# Altium PCB HU_revC_TEMP.PcbDoc (part 5 of 5)
Units mm, origin at the board's own origin, x right, y up, seen from the top; angles counter-clockwise.
Board outline 164 x 88 mm, 6 copper layers (Top Layer, Layer 1, Layer 2, Layer 3, Layer 4, Bottom Layer), stack 1.538 mm thick; 730 components, 570 nets, 2585 pads, 244 vias.
Unrouted connection lines stored in the file: 1558.
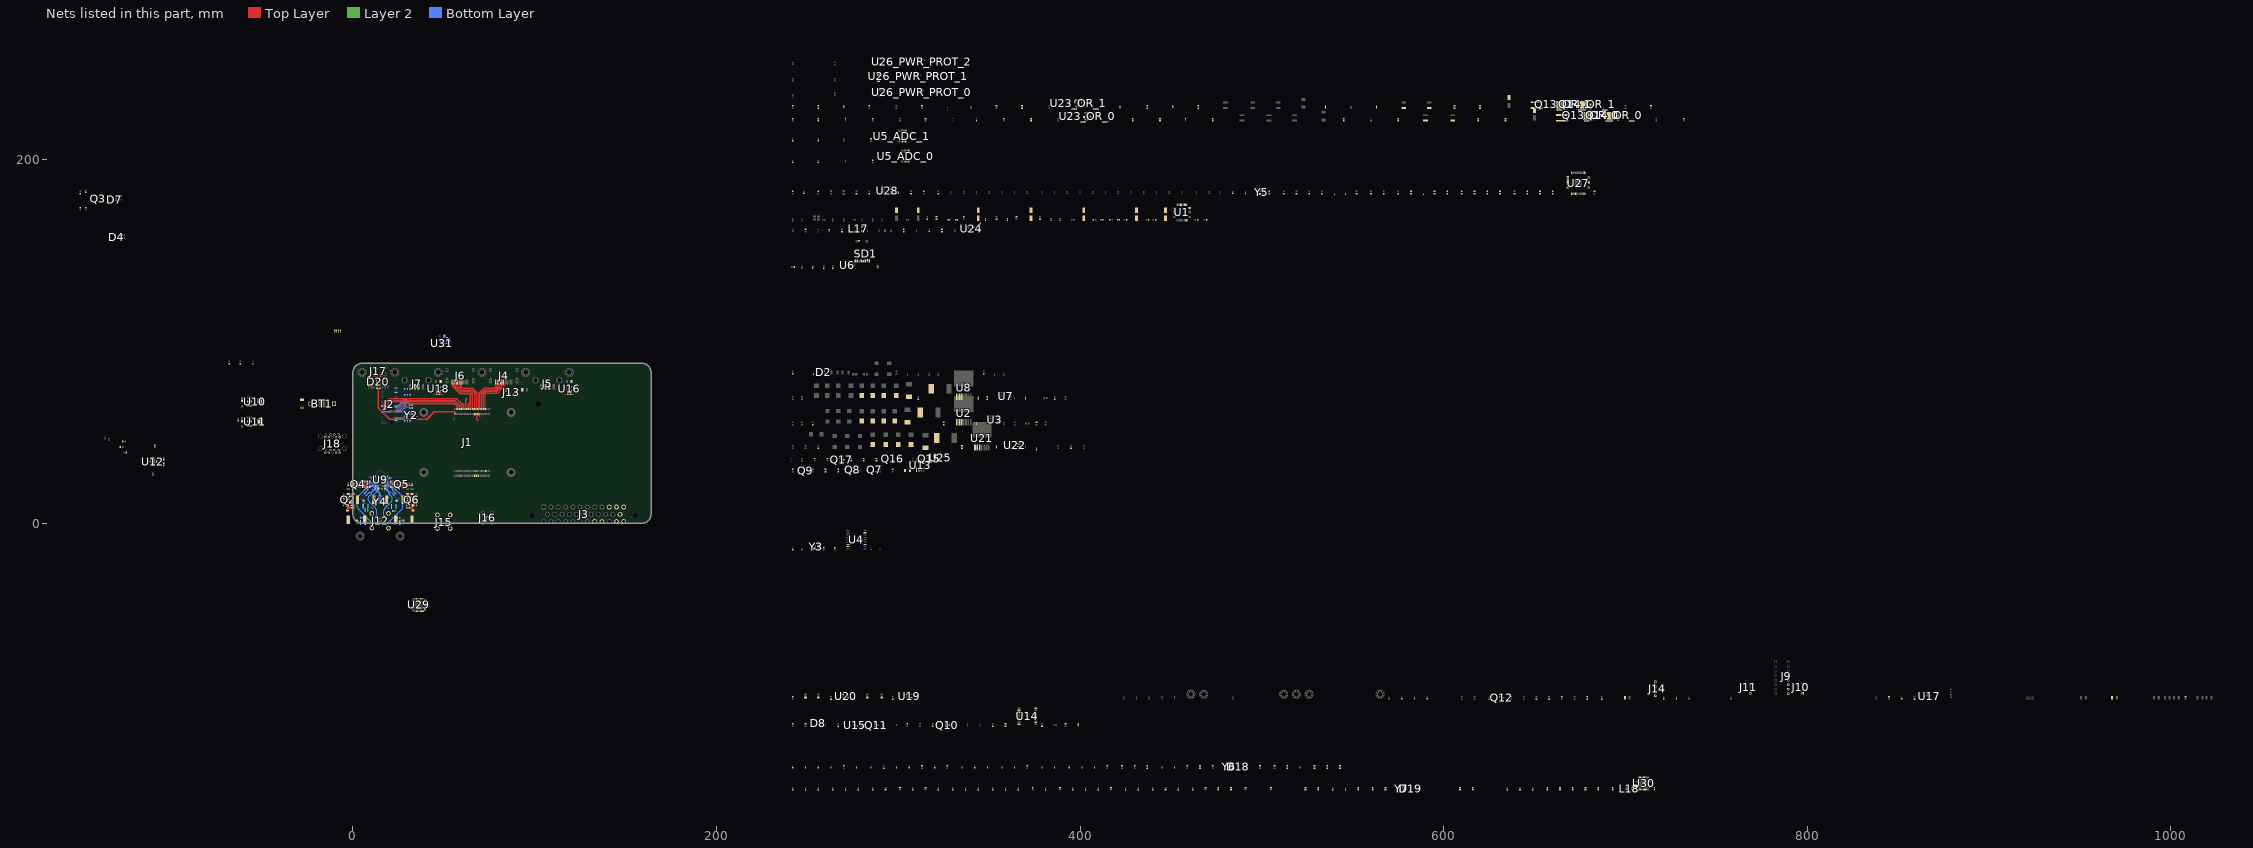
[diagram p5: the nets of this part, all layers, seen from the top]

## Via types
v1: diameter 0.5, hole 0.3, Top Layer to Bottom Layer, 244 vias

## Nets (pads, with @x,y where several pads share a name; then routed paths per layer and width w, separated by ;. In a path a pad name is that pad's centre, name@x,y a point inside that pad or via, vN(x,y) a via of type N, cw(c..) or ccw(c..) an arc to the next point about the centre after c; other vN are vias at no path point) (continued)
HDMI0_CK_P: J1.188 J4.10 | length 22.8
  Top Layer w0.123: J1.188@72.9,62.82 72.938,62.858 72.938,70.896 73.616,71.573 79.616,71.573 83.338,75.296 83.338,76.19 83.2,76.328 83.2,76.339 83,76.539 J4.10@83,77.69
HDMI0_D0_N: J1.184 J4.9 | length 22.7
  Top Layer w0.123: J1.184@72.1,62.82 72.062,62.858 72.062,63.401 72.062,71.062 73.25,72.25 79.25,72.25 82.162,75.162 82.162,76.19 82.3,76.328 82.3,76.339 82.5,76.539 J4.9@82.5,77.69
HDMI0_D0_P: J1.182 J4.7 | length 22.7
  Top Layer w0.123: J1.182@71.7,62.82 71.738,62.858 71.738,71.196 73.116,72.573 79.116,72.573 81.838,75.296 81.838,76.19 81.7,76.328 81.7,76.339 81.5,76.539 J4.7@81.5,77.69
HDMI0_D1_N: J1.178 J4.6 | length 22.6
  Top Layer w0.123: J1.178@70.9,62.82 70.862,62.858 70.862,63.401 70.862,71.362 72.75,73.25 78.75,73.25 80.662,75.162 80.662,76.19 80.8,76.328 80.8,76.339 81,76.539 J4.6@81,77.69
HDMI0_D1_P: J1.176 J4.4 | length 22.6
  Top Layer w0.123: J1.176@70.5,62.82 70.538,62.858 70.538,71.496 72.616,73.573 78.616,73.573 80.338,75.296 80.338,76.19 80.2,76.328 80.2,76.339 80,76.539 J4.4@80,77.69
HDMI0_D2_N: J1.172 J4.3 | length 22.5
  Top Layer w0.123: J1.172@69.7,62.82 69.662,62.858 69.662,63.401 69.662,71.662 72.25,74.25 78.25,74.25 79.162,75.162 79.162,76.19 79.3,76.328 79.3,76.339 79.5,76.539 J4.3@79.5,77.69
HDMI0_D2_P: J1.170 J4.1 | length 22.5
  Top Layer w0.123: J1.170@69.3,62.82 69.338,62.858 69.338,71.796 72.116,74.573 78.116,74.573 78.838,75.296 78.838,76.19 78.7,76.328 78.7,76.339 78.5,76.539 J4.1@78.5,77.69
HDMI1_CK_N: J1.166 J6.12 | length 21.7
  Top Layer w0.123: J6.12@60,77.69 60,76.539 59.8,76.339 59.8,76.328 59.662,76.19 59.662,75.338 60.427,74.573 65.634,74.573 68.462,71.746 68.462,63.401 68.462,62.858 J1.166@68.5,62.82
HDMI1_CK_P: J1.164 J6.10 | length 21.7
  Top Layer w0.123: J6.10@59,77.69 59,76.539 59.2,76.339 59.2,76.328 59.338,76.19 59.338,75.204 60.293,74.25 65.5,74.25 68.138,71.612 68.138,62.858 J1.164@68.1,62.82
HDMI1_D0_N: J1.160 J6.9 | length 21.8
  Top Layer w0.123: J6.9@58.5,77.69 58.5,76.539 58.3,76.339 58.3,76.328 58.162,76.19 58.162,75.338 59.927,73.573 65.134,73.573 67.262,71.446 67.262,63.401 67.262,62.858 J1.160@67.3,62.82
HDMI1_D0_P: J1.158 J6.7 | length 21.8
  Top Layer w0.123: J6.7@57.5,77.69 57.5,76.539 57.7,76.339 57.7,76.328 57.838,76.19 57.838,75.204 59.793,73.25 65,73.25 66.938,71.312 66.938,62.858 J1.158@66.9,62.82
HDMI1_D1_N: J1.154 J6.6 | length 22
  Top Layer w0.123: J6.6@57,77.69 57,76.539 56.8,76.339 56.8,76.328 56.662,76.19 56.662,75.338 59.427,72.573 64.634,72.573 66.062,71.146 66.062,63.401 66.062,62.858 J1.154@66.1,62.82
HDMI1_D1_P: J1.152 J6.4 | length 22
  Top Layer w0.123: J6.4@56,77.69 56,76.539 56.2,76.339 56.2,76.328 56.338,76.19 56.338,75.204 59.293,72.25 64.5,72.25 65.738,71.012 65.738,62.858 J1.152@65.7,62.82
HDMI1_D2_N: J1.148 J6.3 | length 22.1
  Top Layer w0.123: J6.3@55.5,77.69 55.5,76.539 55.3,76.339 55.3,76.328 55.162,76.19 55.162,75.338 58.927,71.573 64.134,71.573 64.862,70.846 64.862,65.102 64.862,62.858 J1.148@64.9,62.82
HDMI1_D2_P: J1.146 J6.1 | length 22.1
  Top Layer w0.123: J6.1@54.5,77.69 54.5,76.539 54.7,76.339 54.7,76.328 54.838,76.19 54.838,75.204 58.793,71.25 64,71.25 64.538,70.712 64.538,64.968 64.538,63.401 64.538,62.858 J1.146@64.5,62.82
HV_CPU_FAN_PWM: J1.19 R152.2 R154.2
HV_PWR_EN: R209.1 U23_OR_0.7 U23_OR_1.7 U24.7
INT_VCC: F6.1 F18_PWR_PROT_0.1 F18_PWR_PROT_1.1 F18_PWR_PROT_2.1 R211.2 U25.3 U25.4
LAN8830_ALLPHYAD: R243.2 U29.13
LAN8830_CLK125_EN: R254.2 U29.34 U30.24
LAN8830_MODE0: R246.2 U29.33 U30.25
LAN8830_MODE1: R247.2 U29.32 U30.26
LAN8830_MODE2: R248.2 U29.30 U30.27
LAN8830_MODE3: R249.2 U29.29 U30.28
LAN8830_MODE4: R245.2 U29.36 U30.23
LAN8830_PHYAD0: R251.2 R252.2 U29.18
LAN8830_PHYAD1: R244.2 R250.2 U29.16
LAN8830_PHYAD2: R253.2 U29.15
LAN8830_RESET_N: C197.1 R242.2 U29.43
LAN8830_X25_N: C199.1 U29.45 Y6.3
LAN8830_X25_P: C198.1 U29.46 Y6.1
LAN8870_LINK_LED: R273.2 U30.38
LAN8870_MODE_STRP: R276.1 U30.18
LAN8870_RESET_N: C222.1 R263.2 R275.2 U30.39
LAN8870_RXCTL: R268.2 U29.26 U30.17
LAN8870_RXD0: R274.1 U29.19 U30.11
LAN8870_RXD1: R272.1 R278.2 U29.20 U30.12
LAN8870_RXD2: R271.1 U29.21 U30.14
LAN8870_RXD3: R277.2 U29.22 U30.15
LAN8870_SPEED_SEL: R267.1 U30.32
LAN8870_VBAT: C242.1 C243.1 R280.1 R287.2 U30.1
LAN8870_VDDA: C237.1 C238.1 C239.1 C240.1 C241.1 R281.1 R286.2 U30.37 U30.41 U30.45 U30.48
LAN8870_VDDIO: C244.1 C245.1 C246.1 C247.1 R263.1 R267.2 R268.1 R271.2 R272.2 R274.2 R276.2 R288.2 U30.13 U30.20 U30.36
LAN8870_X25_N: C224.1 U30.7 Y7.3
LAN8870_X25_P: C223.1 U30.6 Y7.1
LL_FR_L: C1.1 J10.1 R4.2
LL_FR_R: C2.1 J10.3 R7.2
LL_RR_L: C3.1 J11.1 R11.2
LL_RR_R: C4.1 J11.3 R14.2
LM74910H_ISCP_OR_0: C157_OR_0.1 R190_OR_0.1 U23_OR_0.18
LM74910H_ISCP_OR_1: C157_OR_1.1 R190_OR_1.1 U23_OR_1.18
LM74910H_VS_OR_0: C151_OR_0.1 C152_OR_0.1 Q13_OR_0.5-6-7-8 R187_OR_0.2 R189_OR_0.1 R190_OR_0.2 R191_OR_0.2 R193_OR_0.2 U23_OR_0.22 U23_OR_0.24
LM74910H_VS_OR_1: C151_OR_1.1 C152_OR_1.1 Q13_OR_1.5-6-7-8 R187_OR_1.2 R189_OR_1.1 R190_OR_1.2 R191_OR_1.2 R193_OR_1.2 U23_OR_1.22 U23_OR_1.24
LNA_EN: R132.1 U14.13
M2_3V3: C36.1 C37.1 C38.1 C39.1 C40.1 C41.1 C42.1 C43.1 C44.1 C45.1 D4.2 D4.3 J2.2 J2.4 J2.12 J2.14 J2.16 J2.18 J2.70 J2.72 J2.74 R45.1 R46.1 U31.1 Y2.1 Y2.4
MATENET_GND: C124.1 C125.1 C126.1 C127.1 C221.1 J15.3 R264.2
MAX96724_1V2: C86.1 C98.2 C99.2 C101.2 C102.2 C109.2 C110.2 C111.1 R106.2 U9.30 U9.55 U9.56 U11.2 U11.4 | length 4.3
  Bottom Layer w0.3: v1(9.25,25.5) 9.288,25.462 9.649,25.462 U9.30@10.315,24.795 ; U9.55@19.685,24.795 20.601,25.712 20.712,25.712 v1(20.75,25.75) ; U9.56@20.038,24.442 20.596,25 v1(21.25,25)
MAX96724_1V8: C84.1 C103.2 C104.2 C105.2 C106.2 C112.1 U9.7 U9.21 U10.2 U10.4 | length 4.4
  Bottom Layer w0.3: v1(10.75,19.75) 10.776,19.75 11.026,20 11.354,20 U9.21@12.437,21.083 ; U9.7@17.917,21.437 19.315,20.038 19.462,20.038 v1(19.5,20)
MAX96724_3V3: C83.2 C85.2 C107.2 C108.2 C113.1 F12.1 R71.2 R83.2 R99.2 U9.24 U10.3 U11.3 | length 1.1
  Bottom Layer w0.3: v1(10.5,21.5) 10.538,21.538 10.77,21.538 U9.24@11.376,22.144
MAX96724_CFG0: R71.1 R74.2 U9.4 | length 7.2
  Bottom Layer w0.2: U9.4@18.977,22.497 19.225,22.25 21.75,22.25 R74.2@23.79,20.21 R71.1@24.79,21.21
MAX96724_CFG1: R83.1 R88.2 U9.25 | length 7.2
  Bottom Layer w0.2: R83.1@5.21,21.21 R88.2@6.21,20.21 8.25,22.25 10.775,22.25 U9.25@11.023,22.497
MAX96724_PoC_A: C65.2 J12.2 L5.2 | length 25.3
  Bottom Layer w0.156: C65.2@6.412,18.412 3.244,15.244 ccw(c5.04,13.448) 2.5,13.448 2.5,9.45 ccw(c5.04,9.45) 3.244,7.654 L5.2@9.949,0.949 10.244,0.654 ccw(c12.04,2.45) 12.04,-0.09 J12.2@13,-0.09
MAX96724_PoC_A_V_N: L3.1 R70.1 R108.1 | length 3.4
  Top Layer w0.2: R70.1@-3,7.05 -3,8.25 -2.883,8.367 -2.049,8.367 -1.916,8.5 R108.1@-0.9,8.5
MAX96724_PoC_A_V_P: C68.2 Q2.4 R70.2 R107.1 | length 3.7
  Top Layer w0.2: R70.2@-3,9.95 -3,9 -2.75,8.75 -2.075,8.75 -0.9,9.925 R107.1@-0.9,10
MAX96724_PoC_B: C69.2 J12.1 L8.2 | length 13.6
  Bottom Layer w0.156: 8.284,13.48 ccw(c10.372,13.479) 8.897,12.001 ; 8.284,13.481 cw(c10.228,13.479) 8.854,14.854 C69.2@9.412,15.412 ; J12.1@13,3.91 13,6.846 ccw(c10.46,6.846) 12.256,8.642 L8.2@11.449,9.449 8.898,12 ; 8.897,12.001 8.898,12
MAX96724_PoC_B_V_N: L6.1 R82.1 R110.1 | length 4
  Top Layer w0.2: R82.1@6,20.05 6,21.283 6.117,21.4 7,21.4 7.55,20.85 7.55,20.3 R110.1@7.85,20
MAX96724_PoC_B_V_P: C72.2 Q4.4 R82.2 R109.1 | length 4.9
  Top Layer w0.2: R82.2@6,22.95 6,21.817 6.117,21.7 7.821,21.7 C72.2@8.021,21.5
  Top Layer w0.3: R109.1@7.85,23 7.936,22.914 7.936,21.7 7.936,21.586 C72.2@8.021,21.5
MAX96724_PoC_C: C73.2 J12.4 L11.2 | length 13.6
  Bottom Layer w0.156: J12.4@17,3.91 17,6.846 cw(c19.54,6.846) 17.744,8.642 L11.2@18.551,9.449 21.102,12 ; C73.2@20.588,15.412 21.146,14.854 cw(c19.772,13.479) 21.716,13.481 ; 21.716,13.48 cw(c19.628,13.479) 21.103,12.001 ; 21.102,12 21.103,12.001
MAX96724_PoC_C_V_N: L9.1 R93.1 R112.1 | length 3.7
  Top Layer w0.2: R112.1@22.15,20 22.15,20.075 22.733,20.658 22.733,20.983 23,21.25 23.75,21.25 24,21 R93.1@24,20.05
MAX96724_PoC_C_V_P: C78.2 Q5.4 R93.2 R111.1 | length 4.6
  Top Layer w0.2: C78.2@21.979,21.5 22,21.5 22.236,21.736 22.236,21.758 22.35,21.871 22.35,22.15 ; R111.1@22.15,23 22.35,22.8 22.35,22.15 ; R93.2@24,22.95 24,22 23.75,21.75 22.75,21.75 22.35,22.15
MAX96724_PoC_D: C79.2 J12.3 L14.2 | length 25.3
  Bottom Layer w0.156: J12.3@17,-0.09 17.96,-0.09 ccw(c17.96,2.45) 19.756,0.654 L14.2@20.051,0.949 26.756,7.654 ccw(c24.96,9.45) 27.5,9.45 27.5,13.448 ccw(c24.96,13.448) 26.756,15.244 C79.2@23.588,18.412
MAX96724_PoC_D_V_N: L12.1 R100.1 R116.1 | length 3.3
  Top Layer w0.2: R116.1@30.9,8.5 31.15,8.25 32.75,8.25 33,8 R100.1@33,7.05
MAX96724_PoC_D_V_P: C82.2 Q6.4 R100.2 R114.1 | length 3.7
  Top Layer w0.2: R114.1@30.9,10 30.9,9.925 32.075,8.75 32.75,8.75 33,9 R100.2@33,9.95
MAX96724_SIOA_N: C67.1 U9.22 | length 5.9
  Bottom Layer w0.123: C67.1@8.088,18.088 8.088,18.477 7.948,18.617 7.948,18.719 9.729,20.5 11.022,20.5 11.687,21.165 11.811,21.165 U9.22@12.083,21.437
MAX96724_SIOA_P: C65.1 U9.23 | length 5.9
  Bottom Layer w0.123: C65.1@7.088,19.088 7.477,19.088 7.617,18.948 7.719,18.948 9.595,20.823 10.888,20.823 11.458,21.394 11.458,21.519 U9.23@11.73,21.79
MAX96724_SIOB_N: C71.1 U9.19 | length 5.6
  Bottom Layer w0.123: C71.1@9.088,17.088 9.104,17.104 9.492,17.104 9.632,16.963 9.734,16.963 11.365,18.593 11.486,18.593 12.872,19.979 12.872,20.104 U9.19@13.144,20.376
MAX96724_SIOB_P: C69.1 U9.18 | length 5.6
  Bottom Layer w0.123: C69.1@10.088,16.088 10.104,16.104 10.104,16.492 9.963,16.632 9.963,16.734 11.498,18.27 11.62,18.27 13.101,19.751 13.226,19.751 U9.18@13.497,20.023
MAX96724_SIOC_N: C77.1 U9.9 | length 5.7
  Bottom Layer w0.123: U9.9@17.21,20.73 17.481,20.458 17.481,20.333 18,19.814 18,19.229 20.266,16.963 20.368,16.963 20.508,17.104 20.896,17.104 C77.1@20.912,17.088
MAX96724_SIOC_P: C73.1 U9.10 | length 5.7
  Bottom Layer w0.123: U9.10@16.856,20.376 17.128,20.104 17.253,20.104 17.677,19.681 17.677,19.095 20.037,16.734 20.037,16.632 19.896,16.492 19.896,16.104 C73.1@19.912,16.088
MAX96724_SIOD_N: C81.1 U9.6 | length 5.7
  Bottom Layer w0.123: U9.6@18.27,21.79 18.542,21.519 18.667,21.519 19.186,21 19.771,21 22.037,18.734 22.037,18.632 21.896,18.492 21.896,18.104 C81.1@21.912,18.088
MAX96724_SIOD_P: C79.1 U9.5 | length 5.7
  Bottom Layer w0.123: U9.5@18.624,22.144 18.896,21.872 18.896,21.747 19.319,21.323 19.905,21.323 22.266,18.963 22.368,18.963 22.508,19.104 22.896,19.104 C79.1@22.912,19.088
MAX96724_X_N: C75.2 U9.16 Y4.3 | length 9.2
  Bottom Layer w0.2: Y4.3@13.9,12.85 14.4,12.35 14.805,12.35 14.922,12.467 14.922,13.552 14.856,13.619 14.856,14.647 14.738,14.764 14.715,14.764 C75.2@14.479,15 14.715,15.236 14.738,15.236 14.856,15.353 14.856,16.283 13.647,17.492 13.647,18.608 13.947,18.909 13.947,19.058 U9.16@14.205,19.315
MAX96724_X_P: C74.2 U9.15 Y4.1 | length 9.5
  Bottom Layer w0.2: U9.15@14.558,18.962 14.301,18.705 14.152,18.705 13.935,18.488 13.935,17.611 15.144,16.402 15.144,15.353 15.262,15.236 15.285,15.236 C74.2@15.521,15 15.285,14.764 15.262,14.764 15.144,14.647 15.144,13.738 15.211,13.672 15.211,12.347 15.209,12.346 15.209,11.941 16,11.15 Y4.1@16.1,11.15
MCP2515_X_N: C49.1 U4.7 Y3.3
MCP2515_X_P: C48.1 U4.8 Y3.1
MIC_N: J3.32
MIC_P: C6.2 C7.2 J3.31 R20.1
MINIFAKRA_GND: C120.1 C121.1 C122.1 C123.1 J12.MH1 J12.MH2 J12.MH3 J12.MH4 J12.MH5
NetBT1_1: BT1.1 BT1.2 D1.2
NetC1_2: C1.2 U1.35
NetC2_2: C2.2 U1.36
NetC5_2: C5.2 R16.2 R17.2
NetC6_1: C6.1 U1.23
NetC7_1: C7.1 U1.24
NetC8_1: C8.1 R19.1 R20.2
NetC10_1: C10.1 U1.28
NetC26_1: C26.1 U2.3
NetC26_2: C26.2 D3.1 L1.1 U2.1
NetC27_1: C27.1 C28.1 C29.1 C30.1 U2.2 U26_PWR_PROT_1.3 U26_PWR_PROT_1.4
NetC51_ADC_0_1: C51_ADC_0.1 C52_ADC_0.1 R58_ADC_0.2 U5_ADC_0.13
NetC51_ADC_1_1: C51_ADC_1.1 C52_ADC_1.1 R58_ADC_1.2 U5_ADC_1.13
NetC53_1: C53.1 C54.1 SD1.4 U6.1
NetC56_1: C56.1 U8.3
NetC56_2: C56.2 D6.1 L2.1 U8.1
NetC57_1: C57.1 C58.1 C59.1 C60.1 R65.1 U8.2 U26_PWR_PROT_2.3 U26_PWR_PROT_2.4
NetC66_1: C66.1 L3.2 L4.1 R73.2
  other v1: 3,1.25 3,2
NetC67_2: C67.2 R75.2 | length 1.3
  Bottom Layer w0.156: R75.2@6.46,16.46 C67.2@7.412,17.412
NetC70_1: C70.1 L6.2 L7.1 R85.2 | length 3.3
  Bottom Layer w0.3: L7.1@5.73,9.5 5.73,8.5 5.905,8.325 6.45,8.325 6.85,7.925 R85.2@6.85,7
  other v1: 5.75,11.25 6.5,11.25
NetC71_2: C71.2 R90.2 | length 1.3
  Bottom Layer w0.156: R90.2@7.46,15.46 C71.2@8.412,16.412
NetC76_1: C76.1 L9.2 L10.1 R95.2
NetC77_2: C77.2 R96.2 | length 1.3
  Bottom Layer w0.156: C77.2@21.588,16.412 R96.2@22.54,15.46
NetC80_1: C80.1 L12.2 L13.1 R102.2
  other v1: 27,1.25 27,2
NetC81_2: C81.2 R103.2 | length 1.3
  Bottom Layer w0.156: C81.2@22.588,17.412 R103.2@23.54,16.46
NetC92_2: C92.2 C93.2 C94.2 U9.8 | length 2.2
  Bottom Layer w0.3: U9.8@17.563,21.083 18.962,19.685 18.962,19.538 v1(19,19.5)
NetC95_2: C95.2 C96.2 C97.2 U9.20 | length 2.2
  Bottom Layer w0.3: v1(11.25,19.25) 11.304,19.25 11.404,19.35 11.411,19.35 U9.20@12.79,20.73
NetC139_1: C139.1 U21.3
NetC139_2: C139.2 D10.1 L16.1 U21.1
NetC140_1: C140.1 C141.1 C142.1 C143.1 R182.1 U21.2 U26_PWR_PROT_0.3 U26_PWR_PROT_0.4
NetC150_OR_0_1: C150_OR_0.1 R191_OR_0.1 U23_OR_0.20
NetC150_OR_0_2: C150_OR_0.2 C157_OR_0.2 Q14_OR_0.5-6-7-8 R189_OR_0.2 U23_OR_0.19
NetC150_OR_1_1: C150_OR_1.1 R191_OR_1.1 U23_OR_1.20
NetC150_OR_1_2: C150_OR_1.2 C157_OR_1.2 Q14_OR_1.5-6-7-8 R189_OR_1.2 U23_OR_1.19
NetC151_OR_0_2: C151_OR_0.2 U23_OR_0.23
NetC151_OR_1_2: C151_OR_1.2 U23_OR_1.23
NetC156_OR_0_2: C156_OR_0.2 R192_OR_0.1
NetC156_OR_1_2: C156_OR_1.2 R192_OR_1.1
NetC158_OR_0_1: C158_OR_0.1 R195_OR_0.1 R196_OR_0.2 U23_OR_0.4
NetC158_OR_1_1: C158_OR_1.1 R195_OR_1.1 R196_OR_1.2 U23_OR_1.4
NetC159_OR_0_2: C159_OR_0.2 R197_OR_0.2 U23_OR_0.9
NetC159_OR_1_2: C159_OR_1.2 R197_OR_1.2 U23_OR_1.9
NetC162_1: C162.1 D15.1 R202.2 U24.10
NetC163_1: C163.1 R202.1 R203.2 SW1.2
NetC165_2: C165.2 R204.1 R205.2
NetC196_1: C196.1 U28.6
NetC206_1: C206.1 C207.1 C208.1 C209.1 C210.1 R256.2 U29.23 U29.27 U29.31 U29.40
NetC211_1: C211.1 C212.1 R257.2 U29.47
NetC213_1: C213.1 C214.1 C215.1 R258.2 U29.1 U29.12
NetC216_1: C216.1 C217.1 C218.1 R260.2 U29.4 U29.9
NetC221_2: C221.2 R261.1 R262.1 R264.1
NetC225_1: C225.1 C226.1 R281.2 U30.9
NetC227_1: C227.1 C228.1 C229.1 C230.1 R282.2 U30.10 U30.19 U30.29
NetC231_1: C231.1 C232.1 C233.1 C234.1 R284.2 U30.5 U30.44 U30.46
NetC235_1: C235.1 C236.1 R285.2 U30.22
NetD2_1: D2.1 R31.1
NetD2_4: D2.4 R32.1
NetD4_1: D4.1 R47.1
NetD4_4: D4.4 R49.1
NetD7_1: D7.1 R80.2
NetD7_2: D7.2 Q3.3
NetD7_3: D7.3 Q3.6
NetD7_4: D7.4 R81.2
NetD8_1: D8.1 R135.2
NetD8_4: D8.4 R136.2
NetD13_OR_0_1: D13_OR_0.1 R137.2 R193_OR_0.1 U23_OR_0.6
NetD13_OR_1_1: D13_OR_1.1 R193_OR_1.1 U23_OR_1.6
NetD18_1: D18.1 R250.1
NetD18_4: D18.4 R252.1
NetD19_1: D19.1 R273.1
NetD19_4: D19.4 R275.1
NetF1_2: F1.2 R48.2 U31.5 | length 2
  Bottom Layer w0.3: U31.5@49.95,100.375 50.075,100.5 R48.2@51.85,100.5
NetF2_1: F2.1 Q2.2 R72.2 | length 3.7
  Top Layer w0.3: F2.1@-2.5,16.17 -2.08,15.75 -1.75,15.75 -0.251,14.251 -0.251,13.9 -0.001,13.65 R72.2@0,13.65
NetF3_1: F3.1 Q4.2 R84.2 | length 3.1
  Top Layer w0.3: R84.2@0.5,20.85 0.589,20.939 2.624,20.939 2.8,20.763 2.8,20.4 Q4.2@3,20.2
NetF4_1: F4.1 Q5.2 R94.2 | length 4.2
  Top Layer w0.3: Q5.2@27,20.2 27.2,20 27.2,19.426 27.376,19.25 28.5,19.25 29.426,20.176 29.426,20.776 R94.2@29.5,20.85
NetF5_1: F5.1 Q6.2 R101.2 | length 3.7
  Top Layer w0.3: R101.2@30,13.65 30.006,13.65 30.256,13.9 30.256,14.246 32.18,16.17 F5.1@32.5,16.17
NetF6_2: F6.2 Q7.1 Q7.2 Q7.3 Q8.1 Q8.2 Q8.3 R120.2
NetF13_2: F13.2 U16.5
NetF15_2: F15.2 U18.5
NetF16_1: F16.1 J13.1
NetF17_1: F17.1 J14.1
NetF18_PWR_PROT_0_2: F18_PWR_PROT_0.2 U26_PWR_PROT_0.1 U26_PWR_PROT_0.2
NetF18_PWR_PROT_1_2: F18_PWR_PROT_1.2 U26_PWR_PROT_1.1 U26_PWR_PROT_1.2
NetF18_PWR_PROT_2_2: F18_PWR_PROT_2.2 U26_PWR_PROT_2.1 U26_PWR_PROT_2.2
NetJ1_78: J1.78 R24.1
NetJ2_68: J2.68 R44.2 | length 5.2
  Bottom Layer w0.3: J2.68@23.65,58 27.575,58 28.425,58.85 R44.2@28.5,58.85
NetJ13_2: J13.2 R152.1
NetJ13_4: J13.4 R156.1
NetJ14_2: J14.2 R153.1
NetJ14_4: J14.4 R157.1
NetJ16_1: J16.1 L15.2 R124.2
NetJ18_5: J18.5 R174.2
NetJ18_6: J18.6 R173.2
NetJ18_8: J18.8 R172.2
NetJ18_9: J18.9 R171.2
NetL4_2: L4.2 L5.1 R73.1 | length 3
  Bottom Layer w0.3: R73.1@5.65,3 5.65,2.925 6.595,1.98 6.595,0.655 L4.2@6.75,0.5
NetL7_2: L7.2 L8.1 R85.1 | length 2.5
  Bottom Layer w0.3: R85.1@8.15,7 8.21,7.06 8.21,9.44 L7.2@8.27,9.5
NetL10_2: L10.2 L11.1 R95.1
NetL13_2: L13.2 L14.1 R102.1
NetQ2_1: Q2.1 R76.1 R77.2 | length 5.7
  Top Layer w0.3: R76.1@-5,14.85 R77.2@-5,13.65 -4.925,13.65 -4.525,13.25 -1.851,13.25 -1.676,13.426 -1.676,14.174 Q2.1@-1.55,14.3
NetQ2_3: Q2.3 Q2.6 R72.1 | length 5.1
  Top Layer w0.3: Q2.6@-1.55,11.85 -1.05,12.35 R72.1@0,12.35
  Layer 2 w0.3: v1(-3.45,14.3) -1.55,12.4 v1(-1.55,11.7)
NetQ3_2: Q3.2 R87.2 R89.2
NetQ3_5: Q3.5 R78.1 R79.1
NetQ4_1: Q4.1 R91.1 R92.2 | length 4.8
  Top Layer w0.3: R92.2@-2.5,20.85 R91.1@-1,20.85 -0.925,20.85 -0.275,20.2 Q4.1@2.05,20.2
NetQ4_3: Q4.3 Q4.6 R84.1 | length 5.4
  Top Layer w0.3: R84.1@0.5,22.15 1.55,22.15 Q4.6@2.05,22.65 ; Q4.6@2.05,22.8 Q4.6@2.05,22.65 ; Q4.3@3.95,20.2 3.75,20.4 3.75,20.75 3,21.5 2.5,21.5 2.05,21.95 Q4.6@2.05,22.65
NetQ5_1: Q5.1 R97.1 R98.2 | length 7.6
  Top Layer w0.3: Q5.1@26.05,20.2 26.193,20.343 26.193,20.943 26.739,21.489 30.286,21.489 30.925,20.85 R97.1@31,20.85 R98.2@32.5,20.85
NetQ5_3: Q5.3 Q5.6 R94.1 | length 7.5
  Top Layer w0.3: v1(26.05,22.8) 26.25,22.6 26.25,22.139 26.426,21.964 29.314,21.964 R94.1@29.5,22.15
  Layer 2 w0.3: v1(26.05,22.8) 26.05,22.1 v1(27.95,20.2)
NetQ6_1: Q6.1 R104.1 R105.2 | length 2.7
  Top Layer w0.3: Q6.1@33.45,14.3 34.375,14.3 ; R105.2@35,13.65 34.925,13.65 34.375,14.2 34.375,14.3 ; R104.1@35,14.85 34.925,14.85 34.375,14.3
NetQ6_3: Q6.3 Q6.6 R101.1 | length 6.2
  Top Layer w0.3: R101.1@30,12.35 30.25,12.6 30.525,12.6 30.713,12.788 ; Q6.3@31.55,14.3 31.35,14.1 31.35,13.35 30.75,12.75 32.817,12.75 33.25,12.317 33.25,11.9 Q6.6@33.45,11.7
NetQ7_5-6-7-8: Q7.5-6-7-8 Q8.5-6-7-8 U13.1 U13.2
NetQ9_1: Q9.1 R122.2 R123.2
NetQ9_3: Q9.3 R121.1
NetQ10_1: Q10.1 R126.1 R127.1
NetQ10_3: Q10.3 R128.1 R129.1
NetQ11_1: Q11.1 R132.2 R133.1
NetQ12_1: Q12.1 R159.2 R161.1
NetQ13_OR_0_4: Q13_OR_0.4 U23_OR_0.1
NetQ13_OR_1_4: Q13_OR_1.4 U23_OR_1.1
NetQ14_OR_0_4: Q14_OR_0.4 R192_OR_0.2 U23_OR_0.14
NetQ14_OR_1_4: Q14_OR_1.4 R192_OR_1.2 U23_OR_1.14
NetQ15_5-6-7-8: Q15.5-6-7-8 Q16.5-6-7-8 U25.1 U25.2
NetQ17_1: Q17.1 R209.2 R210.2
NetQ17_3: Q17.3 R208.1
NetR5_1: R5.1 U1.43
NetR6_1: R6.1 U1.38
NetR8_1: R8.1 U1.39
NetR9_1: R9.1 U1.44
NetR10_1: R10.1 U1.33
NetR12_1: R12.1 U1.46
NetR13_1: R13.1 U1.34
NetR15_1: R15.1 U1.47
NetR16_1: R16.1 U1.40
NetR17_1: R17.1 U1.41
NetR34_2: R34.2
NetR37_1: R37.1
NetR37_2: R37.2 U3.7
NetR38_1: R38.1 U3.6
NetR48_1: R48.1 R50.1 R51.2 U31.4 | length 8.6
  Bottom Layer w0.3: U31.4@48.05,100.375 48.05,100.15 49.2,99 R51.2@51.85,99 51.85,99.075 52.9,100.125 52.9,100.25 R48.1@53.15,100.5 53.15,100.575 52.1,101.625 52.1,101.75 R50.1@51.85,102
NetR56_2: R56.2 R148.1 U4.17
NetR57_2: R57.2 R146.1 U4.12
NetR59_1: R59.1 R60.1 R61.2 U6.4
NetR63_1: R63.1 R65.2
NetR66_1: R66.1
NetR66_2: R66.2 U7.7
NetR67_1: R67.1 U7.6
NetR86_2: R86.2 U9.17 | length 5.6
  Bottom Layer w0.2: R86.2@11.21,15.21 11.21,15.599 13,17.389 13,18.818 U9.17@13.851,19.669
NetR113_1: R113.1 U12.16
NetR115_1: R115.1 U12.1
NetR117_1: R117.1 U12.6
NetR118_2: R118.2 U13.7
NetR125_2: R125.2 U14.9
NetR131_2: R131.2 TP4.1 U14.18
NetR134_1: R134.1 U15.4
NetR138_1: R138.1 R139.2 U16.4 | length 4.1
  Top Layer w0.3: R139.2@118.15,71 R138.1@119.85,71 119.85,72.75 120.15,73.05 U16.4@120.375,73.05
NetR147_1: R147.1 R149.2 U17.1
NetR150_1: R150.1 R151.2 U18.4 | length 4.1
  Top Layer w0.3: R151.2@46.15,71 R150.1@47.85,71 47.85,72.75 48.15,73.05 U18.4@48.375,73.05
NetR163_2: R163.2 U14.2
NetR164_2: R164.2 U14.3
NetR175_1: R175.1 R176.2 U19.4
NetR177_1: R177.1 R178.2 U20.4
NetR180_1: R180.1 R182.2
NetR183_1: R183.1
NetR183_2: R183.2 U22.7
NetR184_1: R184.1 U22.6
NetR195_OR_0_2: R195_OR_0.2 R200_OR_0.2 U23_OR_0.3
NetR195_OR_1_2: R195_OR_1.2 R200_OR_1.2 U23_OR_1.3
NetR199_OR_0_2: R199_OR_0.2 U23_OR_0.11
NetR199_OR_1_2: R199_OR_1.2 U23_OR_1.11
NetR200_OR_0_1: R200_OR_0.1 R201_OR_0.2 U23_OR_0.5
NetR200_OR_1_1: R200_OR_1.1 R201_OR_1.2 U23_OR_1.5
NetR203_1: R203.1 U24.9
NetR214_2: R214.2 R218.1 U27.16
NetR215_2: R215.2 U27.33
NetR216_2: R216.2 U27.34
NetR217_2: R217.2 U27.21
NetR219_2: R219.2 U27.22
NetR220_2: R220.2 U27.41
NetR221_2: R221.2 U27.42
NetR222_2: R222.2 U27.49
NetR223_2: R223.2 U27.50
NetR224_2: R224.2 U27.56
NetR225_2: R225.2 U27.57
NetR226_1: R226.1 U27.8
NetR227_1: R227.1 U27.9
NetR228_1: R228.1 U27.10
NetR229_1: R229.1 U27.13
NetR230_1: R230.1 U27.64
NetR231_1: R231.1 U27.1
NetR232_1: R232.1 U27.3
NetR233_1: R233.1 U27.4
NetR235_1: R235.1 R236.2 U27.7
NetR237_1: R237.1 U27.32
NetR239_1: R239.1 R241.2 U28.7
NetR240_2: R240.2 U28.3
NetR259_1: R259.1 U29.48
NetR265_1: R265.1 U30.4
NetR266_1: R266.1 U30.8
NetR280_2: R280.2 R283.1 U30.3
NetR289_1: R289.1 U30.47
NetR290_1: R290.1 U30.21
NetSD1_9: SD1.9
NetTP5_1: TP5.1 U27.17
NetTP6_1: TP6.1 U27.5
NetTP7_1: TP7.1 U27.6
NetU5_ADC_0_4: U5_ADC_0.4
NetU5_ADC_0_5: U5_ADC_0.5
NetU5_ADC_0_6: U5_ADC_0.6
NetU5_ADC_0_7: U5_ADC_0.7
NetU5_ADC_0_8: U5_ADC_0.8
NetU5_ADC_0_9: U5_ADC_0.9
NetU5_ADC_0_10: U5_ADC_0.10
NetU5_ADC_0_11: U5_ADC_0.11
NetU5_ADC_1_4: U5_ADC_1.4
NetU5_ADC_1_5: U5_ADC_1.5
NetU5_ADC_1_6: U5_ADC_1.6
NetU5_ADC_1_7: U5_ADC_1.7
NetU5_ADC_1_8: U5_ADC_1.8
NetU5_ADC_1_9: U5_ADC_1.9
NetU5_ADC_1_10: U5_ADC_1.10
NetU5_ADC_1_11: U5_ADC_1.11
NetU29_25: U29.25 U30.16
nPCIE_CLKREQ: J2.52 R42.1 | length 5.5
  Bottom Layer w0.3: J2.52@23.65,62 27,62 R42.1@28.5,63.5
nPCIE_RST: J2.50 R41.1 R46.2 | length 9.4
  Bottom Layer w0.3: J2.50@23.65,62.5 26,62.5 R41.1@28.5,65 29.25,64.25 30.675,64.25 31.35,63.575 R46.2@31.35,63.5
nPCIE_WAKE: J2.54 R43.1 | length 5.1
  Bottom Layer w0.3: J2.54@23.65,61.5 28,61.5 R43.1@28.5,62
PCIE_CLK_N: J1.112 J2.53 | length 46
  Top Layer w0.178: v1(21,61.875) 21.079,61.875 21.265,61.689 23.119,61.689 27.679,66.25 55.785,66.25 57.689,64.346 57.689,62.831 J1.112@57.7,62.82
  Bottom Layer w0.178: J2.53@16.1,61.75 16.161,61.689 18.582,61.689 20.735,61.689 20.921,61.875 v1(21,61.875)
PCIE_CLK_P: J1.110 J2.55 | length 45.4
  Top Layer w0.178: v1(21,61.125) 21.079,61.125 21.265,61.311 23.275,61.311 27.836,65.872 55.628,65.872 56.233,65.267 56.5,65 57.311,64.189 57.311,62.831 J1.110@57.3,62.82
  Bottom Layer w0.178: J2.55@16.1,61.25 16.161,61.311 18.739,61.311 20.735,61.311 20.921,61.125 v1(21,61.125)
PCIE_RX0_N: J1.118 J2.43 | length 52.1
  Top Layer w0.178: v1(21,64.125) 20.921,64.125 20.735,64.311 19.689,64.311 19.468,64.532 19.093,64.907 19.093,66.093 20.407,67.407 20.628,67.628 56.157,67.628 58.889,64.896 58.889,62.831 J1.118@58.9,62.82
  Bottom Layer w0.178: J2.43@16.1,64.25 16.161,64.311 20.735,64.311 20.921,64.125 v1(21,64.125)
PCIE_RX0_P: J1.116 J2.41 | length 50.2
  Top Layer w0.178: v1(21,64.875) 20.921,64.875 20.735,64.689 19.846,64.689 19.471,65.063 19.471,65.937 20.785,67.25 56,67.25 57.75,65.5 58.511,64.739 58.511,63.323 58.511,62.831 J1.116@58.5,62.82
  Bottom Layer w0.178: J2.41@16.1,64.75 16.161,64.689 20.735,64.689 20.921,64.875 v1(21,64.875)
PCIE_TX0_N: J1.124 J2.49 | length 56.3
  Top Layer w0.178: v1(19,62.625) 18.921,62.625 18.735,62.811 17.689,62.811 17.468,63.032 17.154,63.346 16.933,63.567 16.933,65.718 20.093,68.878 56.907,68.878 60.089,65.696 60.089,62.831 J1.124@60.1,62.82
  Bottom Layer w0.178: J2.49@16.1,62.75 16.161,62.811 17.739,62.811 18.735,62.811 18.921,62.625 v1(19,62.625)
PCIE_TX0_P: J1.122 J2.47 | length 54.4
  Top Layer w0.178: v1(19,63.375) 18.921,63.375 18.735,63.189 17.846,63.189 17.311,63.724 17.311,65.561 20.25,68.5 56.75,68.5 59,66.25 59.711,65.539 59.711,63.323 59.711,62.831 J1.122@59.7,62.82
  Bottom Layer w0.178: J2.47@16.1,63.25 16.161,63.189 17.582,63.189 18.735,63.189 18.921,63.375 v1(19,63.375)
PRE_CAN_N: L17.3 U24.12
PRE_CAN_P: L17.2 U24.13
PRE_RC_DBG_USB_N: J1.103 R166.2 | length 58.7
  Top Layer w0.158: R166.2@13.25,74.35 13.558,74.042 13.716,74.042 13.821,73.936 13.821,63.423 15.871,61.374 20.102,57.142 40.898,57.142 41.003,57.247 41.108,57.352 45.006,61.25 55.75,61.25 56.121,60.879 56.121,60.201 J1.103@56.1,60.18
PRE_RC_DBG_USB_P: J1.105 R165.2 | length 58.7
  Top Layer w0.158: R165.2@14.75,74.35 14.442,74.042 14.284,74.042 14.179,73.936 14.179,63.571 16.25,61.5 20.25,57.5 40.75,57.5 44.857,61.607 55.898,61.607 56.108,61.398 56.479,61.027 56.479,60.201 J1.105@56.5,60.18
PRE_VCC: C147_OR_0.2 C147_OR_1.2 C148_OR_0.1 C148_OR_1.1 C149_OR_0.1 C149_OR_1.1 D15.2 Q14_OR_0.1-2-3 Q14_OR_1.1-2-3 Q15.1 Q15.2 Q15.3 Q16.1 Q16.2 Q16.3 R207.2 U23_OR_0.15 U23_OR_0.16 U23_OR_1.15 U23_OR_1.16
PWR_IN_SW_GATE: Q15.4 Q16.4 R207.1 R208.2
PWR_SW_GATE: Q7.4 Q8.4 R120.1 R121.2
RF_IN: R124.1 U14.11
RL_N: J3.23 J9.8
RL_P: J3.12 J9.7
RPI_1V8: J1.88 J1.90
RR_N: J3.11 J9.6
RR_P: J3.10 J9.5
RSOL: C3.2 R6.2 R10.2
RSOR: C4.2 R8.2 R13.2
SD_CLK: J1.57 SD1.5
SD_CMD: J1.62 SD1.3
SD_DAT0: J1.63 SD1.7
SD_DAT1: J1.67 SD1.8
SD_DAT2: J1.69 SD1.1
SD_DAT3: J1.61 SD1.2
SENSE1_N: C87.1 R108.2 U12.12
SENSE1_P: C87.2 R107.2 U12.11
SENSE2_N: C88.1 R110.2 U12.14
SENSE2_P: C88.2 R109.2 U12.13
SENSE3_N: C89.1 R112.2 U12.7
SENSE3_P: C89.2 R111.2 U12.8
SENSE4_N: C100.1 R116.2 U12.9
SENSE4_P: C100.2 R114.2 U12.10
SMB_CLK: J2.40 TP1.1 | length 5.6
  Bottom Layer w0.3: J2.40@23.65,65 25,65 TP1.1@28,68
SMB_DATA: J2.42 TP2.1 | length 7.3
  Bottom Layer w0.3: J2.42@23.65,64.5 25.5,64.5 29,68 TP2.1@29.5,68
SMB_nALERT: J2.44 R45.2 TP3.1 | length 9.7
  Bottom Layer w0.3: J2.44@23.65,64 26,64 28.5,66.5 TP3.1@29.5,66.5 30.5,66.5 31.251,65.749 31.251,65.099 R45.2@31.35,65
SUB_N: J3.35
SUB_P: C5.1 J3.34 R18.2
SUSCLK_32: R44.1 Y2.3 | length 2.7
  Bottom Layer w0.3: R44.1@28.5,60.15 31.15,60.15 Y2.3@31.188,60.112
TRX_CON_N: C220.2 J15.2 R261.2
TRX_CON_P: C219.2 J15.1 R262.2
TRX_N: L18.2 U30.42
TRX_P: L18.1 U30.43
TRX_TERM_N: C220.1 L18.3
TRX_TERM_P: C219.1 L18.4
TUSB4041_USB2_DN0_N: J18.2 R216.1
TUSB4041_USB2_DN0_P: J18.3 R215.1
TUSB4041_USB2_DN1_N: R3.2 R221.1
TUSB4041_USB2_DN1_P: R1.2 R2.2 R220.1
TUSB4041_USB2_DN2_N: J5.2 R223.1
TUSB4041_USB2_DN2_P: J5.3 R222.1
TUSB4041_USB2_DN3_N: J7.2 R225.1
TUSB4041_USB2_DN3_P: J7.3 R224.1
TUSB4041_USB2_UP_N: J1.136 R219.1 | length 5.8
  Top Layer w0.158: J1.136@62.5,62.82 62.479,62.841 62.479,68.236 62.675,68.433 v1(62.675,68.5)
TUSB4041_USB2_UP_P: J1.134 R217.1 | length 5.8
  Top Layer w0.158: v1(61.925,68.5) 61.925,68.433 62.121,68.236 62.121,63.354 62.121,62.841 J1.134@62.1,62.82
TUSB4041_X24_N: C170.1 R234.1 U27.29 Y5.3
TUSB4041_X24_P: C169.1 R234.2 U27.30 Y5.1
USB2_CC1: D20.1 D20.10 J17.A5 R167.2 R169.1 | length 9
  Top Layer w0.3: J17.A5@15.25,81.25 15.25,79 15,78.75 D20.1@15,78.417 D20.10@15,77.582 15,77.25 15.25,77 16.325,77 R169.1@17.675,75.65 ; R169.1@17.75,75.65 17.825,75.575 19.175,75.575 R167.2@19.25,75.5
USB2_CC2: D20.5 D20.6 J17.B5 R168.2 R170.1 | length 9.2
  Top Layer w0.3: R168.2@8.75,75.5 8.825,75.575 10.175,75.575 R170.1@10.25,75.65 ; R170.1@10.325,75.65 11.675,77 12.75,77 13,77.25 D20.6@13,77.582 D20.5@13,78.417 13,78.75 12.25,79.5 J17.B5@12.25,81.25
USB3_0_RX_N: J1.128 R174.1 | length 3.8
  Top Layer w0.158: v1(60.725,66.5) 60.725,66.433 60.921,66.236 60.921,64.629 60.921,62.841 J1.128@60.9,62.82
USB3_0_RX_P: J1.130 R173.1 | length 3.8
  Top Layer w0.158: J1.130@61.3,62.82 61.279,62.841 61.279,63.354 61.279,64.481 61.279,66.236 61.475,66.433 v1(61.475,66.5)
USB3_0_TX_N: J1.140 R172.1 | length 3.8
  Top Layer w0.158: v1(63.125,66.5) 63.125,66.433 63.321,66.236 63.321,64.629 63.321,62.841 J1.140@63.3,62.82
USB3_0_TX_P: J1.142 R171.1 | length 3.8
  Top Layer w0.158: J1.142@63.7,62.82 63.679,62.841 63.679,63.354 63.679,64.481 63.679,66.236 63.875,66.433 v1(63.875,66.5)
USB3_1_D_N: J1.165 J18.11 | length 3.5
  Top Layer w0.158: J1.165@68.5,60.18 68.479,60.159 68.479,57.014 68.675,56.817 v1(68.675,56.75)
USB3_1_D_P: J1.163 J18.12 | length 3.5
  Top Layer w0.158: v1(67.925,56.75) 67.925,56.817 68.121,57.014 68.121,60.159 J1.163@68.1,60.18
USB3_1_RX_N: J1.157 J18.14 | length 1.5
  Top Layer w0.158: v1(66.725,58.75) 66.725,58.817 66.921,59.014 66.921,60.159 J1.157@66.9,60.18
USB3_1_RX_P: J1.159 J18.15 | length 1.5
  Top Layer w0.158: J1.159@67.3,60.18 67.279,60.159 67.279,59.014 67.475,58.817 v1(67.475,58.75)
USB3_1_TX_N: J1.169 J18.17 | length 1.5
  Top Layer w0.158: v1(69.125,58.75) 69.125,58.817 69.321,59.014 69.321,60.159 J1.169@69.3,60.18
USB3_1_TX_P: J1.171 J18.18 | length 1.5
  Top Layer w0.158: J1.171@69.7,60.18 69.679,60.159 69.679,59.014 69.875,58.817 v1(69.875,58.75)
USB_1V1_nPG: C193.1 R238.1 U27.18 U28.5
USBA0_5V: C134.1 C135.1 J18.1 U19.1
USBA1_5V: C136.1 C137.1 J18.10 U20.1
VCC_RF: Q10.2 R127.2 U14.14
VDDIO_8830: C200.1 C201.1 C202.1 C203.1 C204.1 C205.1 R242.1 R243.1 R244.1 R245.1 R255.2 U29.17 U29.24 U29.28 U29.35 U29.41
pads on no net: J1.64 J1.68 J1.70 J1.72 J1.73 J2. J2.5 J2.6 J2.7 J2.8 J2.11 J2.13 J2.17 J2.19 J2.20 J2.22 J2.23 J2.24 J2.25 J2.26 J2.28 J2.29 J2.30 J2.31 J2.32 J2.34 J2.35 J2.36 J2.37 J2.38 J2.46 J2.48 J2.56 J2.58 J2.67 J2.69 J3. J4.14 J6.14 J8. J9. J10. J11. J14. J17. J17.A4_B9 J17.A8 J17.B4_A9 J17.B6 J17.B7 J17.B8 R138.2 R150.2 U1.1 U1.5 U1.8 U1.9 U1.10 U1.11 U1.12 U1.14 U1.15 U1.16 U1.17 U1.25 U1.26 U1.31 U1.32 U1.45 U1.48 U2.5 U4.3 U4.4 U4.5 U4.6 U4.10 U4.11 U6.3 U8.5 U9.1 U9.2 U9.3 U9.12 U9.26 U9.27 U9.33 U9.34 U9.51 U9.52 U14.5 U14.6 U14.15 U15.1 U16.3 U18.3 U19.3 U20.3 U21.5 U23_OR_0.8 U23_OR_0.17 U23_OR_0.21 U23_OR_0.25 U23_OR_1.8 U23_OR_1.17 U23_OR_1.21 U23_OR_1.25 U25.7 U25.8 U25.9 U25.10 U26_PWR_PROT_0.7 U26_PWR_PROT_0.8 U26_PWR_PROT_0.9 U26_PWR_PROT_0.10 U26_PWR_PROT_1.7 U26_PWR_PROT_1.8 U26_PWR_PROT_1.9 U26_PWR_PROT_1.10 U26_PWR_PROT_2.7 U26_PWR_PROT_2.8 U26_PWR_PROT_2.9 U26_PWR_PROT_2.10 U27.11 U27.12 U27.14 U27.15 U27.23 U27.24 U27.26 U27.27 U27.28 U27.35 U27.36 U27.38 U27.39 U27.40 U27.43 U27.44 U27.46 U27.47 U27.51 U27.52 U27.54 U27.55 U27.58 U27.59 U27.61 U27.62 U29.14 U29.37 U29.38 U29.39 U29.42 U29.44 U30.2 U30.30 U30.31 U30.33 U30.34 U30.35 U30.40 U31.3
copper on no net:
  other v1: 24.5,42.964 20.5,43.464 20.5,44.214 16.5,44.714 16.5,45.464 18,45.964 18,46.714 14,47.214 14,47.964 11.5,48.464 11.5,49.214 7.5,49.714 7.5,50.464 9,50.964 9,51.714 5,52.214 5,52.964 2.5,53.464 2.5,54.214 45.5,77.5 45.5,78.5 403.451,223.45 404.551,223.45 403.451,224.55 404.551,224.55 398.451,230.45 399.551,230.45 398.451,231.55 399.551,231.55

## Polygon pours and split planes (outlines as drawn)
MAX96724_1V2 on Top Layer "MAX96724_1V2_L01_P040" (solid, remove dead copper, pour order 40): 20.25,23.5 20.5,23.75 21.75,23.75 21.75,25.25 20.5,26.5 17,26.5 17,25.5 19.5,25.5 19.5,23.25 17,23.25 17,22.25 20.25,22.25
MAX96724_1V2 on Top Layer "MAX96724_1V2_L01_P039" (solid, remove dead copper, pour order 39): 8.75,25 10.5,25 10.5,25.5 13,25.5 13,26.5 8.75,26.5
MAX96724_3V3 on Top Layer "MAX96724_3V3_L01_P038" (solid, remove dead copper, pour order 38): 10,21 12,21 12,22.25 13,22.25 13,23.25 10,23.25
MAX96724_1V8 on Top Layer "MAX96724_1V8_L01_P037" (solid, remove dead copper, pour order 37): 20,19.5 20,21 15.5,21 15.5,19.5
MAX96724_1V8 on Top Layer "MAX96724_1V8_L01_P036" (solid, remove dead copper, pour order 36): 10.25,19.5 10.25,21 14.5,21 14.5,19.5
NetC92_2 on Top Layer "NETC92_2_L01_P035" (solid, remove dead copper, pour order 35): 19.5,18.5 19.5,19.5 15.5,19.5 15.5,18.5
NetC95_2 on Top Layer "NETC95_2_L01_P034" (solid, remove dead copper, pour order 34): 10.5,18.5 10.5,19.5 14.5,19.5 14.5,18.5
12V0_PoC on Top Layer "12V0_POC_L01_P033" (solid, remove dead copper, pour order 33): -3.5,18 -3.5,19.5 1,19.5 1,18
12V0_PoC on Top Layer "12V0_POC_L01_P032" (solid, remove dead copper, pour order 32): 29,18 29,19.5 33.5,19.5 33.5,18
MAX96724_PoC_C_V_P on Top Layer "MAX96724_POC_C_V_P_L01_P031" (solid, remove dead copper, pour order 31): 23,22.25 23,25 28.5,25 28.5,22.25 27.5,22.25 27.5,23.5 25,23.5 25,22.25
MAX96724_PoC_D_V_P on Top Layer "MAX96724_POC_D_V_P_L01_P030" (solid, remove dead copper, pour order 30): 32.25,11 32,11.25 32,12.25 31,12.25 31,11 32,10 32,9.25 35.75,9.25 35.75,10.5 34.25,10.5 34.25,11
NetC76_1 on Top Layer "NETC76_1_L01_P029" (solid, remove dead copper, pour order 29): 25,10.5 25,13 23,13 23,15.5 17.5,15.5 17.5,10.5
MAX96724_PoC_C_V_N on Top Layer "MAX96724_POC_C_V_N_L01_P028" (solid, remove dead copper, pour order 28): 28.75,15.5 26.5,15.5 26.5,19.5 25.5,19.5 25.5,20.75 23,20.75 23,13 25,13 25,10.5 28.75,10.5
NetF4_1 on Top Layer "NETF4_1_L01_P026" (solid, remove dead copper, pour order 26): 31,15.25 31,17 29,17 27.5,18.5 27.5,20.75 26.5,20.75 26.5,15.5 28.75,15.5 28.75,15.25
NetF5_1 on Top Layer "NETF5_1_L01_P025" (solid, remove dead copper, pour order 25): 33.5,17 31.5,17 31.5,15.25 32,15.25 32,13.75 33,13.75 33,15.25 33.5,15.25
MAX96724_PoC_D_V_N on Top Layer "MAX96724_POC_D_V_N_L01_P023" (solid, remove dead copper, pour order 23): 31.75,8 31.75,7.75 31.25,7.75 31.25,-0.5 34.25,-0.5 34.25,8
NetC80_1 on Top Layer "NETC80_1_L01_P022" (solid, remove dead copper, pour order 22): 22.25,4.5 22.25,-0.5 27.5,-0.5 27.5,4.5
NetC70_1 on Top Layer "NETC70_1_L01_P017" (solid, remove dead copper, pour order 17): 5,10.5 5,13 7,13 7,15.5 12.5,15.5 12.5,10.5
MAX96724_PoC_B_V_N on Top Layer "MAX96724_POC_B_V_N_L01_P016" (solid, remove dead copper, pour order 16): 1.25,15.5 3.5,15.5 3.5,19.5 4.5,19.5 4.5,20.75 7,20.75 7,13 5,13 5,10.5 1.25,10.5
MAX96724_PoC_B_V_P on Top Layer "MAX96724_POC_B_V_P_L01_P015" (solid, remove dead copper, pour order 15): 3.5,22 7.25,22 7.25,23.75 3.5,23.75
NetF3_1 on Top Layer "NETF3_1_L01_P014" (solid, remove dead copper, pour order 14): -1,15.25 -1,17 1,17 2.5,18.5 2.5,20.75 3.5,20.75 3.5,15.5 1.25,15.5 1.25,15.25
NetF2_1 on Top Layer "NETF2_1_L01_P013" (solid, remove dead copper, pour order 13): -3.5,17 -1.5,17 -1.5,15.25 -2,15.25 -2,13.75 -3,13.75 -3,15.25 -3.5,15.25
MAX96724_PoC_A_V_P on Top Layer "MAX96724_POC_A_V_P_L01_P012" (solid, remove dead copper, pour order 12): -4.25,12.25 -3,12.25 -3,11 -2,11 -2,9.25 -5.5,9.25 -5.5,10.5 -4.25,10.5
MAX96724_PoC_A_V_N on Top Layer "MAX96724_POC_A_V_N_L01_P011" (solid, remove dead copper, pour order 11): -1.75,8 -1.75,7.75 -1.25,7.75 -1.25,-0.5 -4.25,-0.5 -4.25,8
NetC66_1 on Top Layer "NETC66_1_L01_P010" (solid, remove dead copper, pour order 10): 7.75,4.5 7.75,-0.5 2.5,-0.5 2.5,4.5
no net on Top Layer "NONET_L01_P003" (solid, remove dead copper, pour order 3): 47.75,74.5 47.75,79 49.5,79 49.5,74.5
DISP1_5V on Top Layer "DISP1_5V_L01_P002" (solid, remove dead copper, pour order 2): 37.75,76.75 37.75,73.25 44.5,73.25 44.5,74.5 46.25,74.5 46.25,76.75
NetF13_2 on Top Layer "NETF13_2_L01_P001" (solid, remove dead copper, pour order 1): 119.75,74.5 119.75,79 121.5,79 121.5,74.5
DISP0_5V on Top Layer "DISP0_5V_L01_P000" (solid, remove dead copper, pour order 0): 109.75,76.75 109.75,73.25 116.5,73.25 116.5,74.5 118.25,74.5 118.25,76.75
NetL10_2 on Bottom Layer "NETL10_2_L06_P021" (solid, remove dead copper, pour order 21): 22.25,11 22.25,7.75 19.25,7.75 18.625,8.375 19.5,9.25 21.25,9.25 21.25,11
NetC76_1 on Bottom Layer "NETC76_1_L06_P020" (solid, remove dead copper, pour order 20): 25.5,12.25 24,13.75 23,12.75 23,7.75 24.75,7.75 24.75,11.5
NetL13_2 on Bottom Layer "NETL13_2_L06_P019" (solid, remove dead copper, pour order 19): 23.75,2 23.75,-1 21,-1 20.125,-0.125 21.125,0.875 21.375,0.625 22.75,2
NetC80_1 on Bottom Layer "NETC80_1_L06_P018" (solid, remove dead copper, pour order 18): 25,3.75 28.75,3.75 28.75,0.75 26.75,0.75 26.75,-1 25,-1
NetL7_2 on Bottom Layer "NETL7_2_L06_P009" (solid, remove dead copper, pour order 9): 7.75,11 7.75,7.75 10.75,7.75 11.375,8.375 10.5,9.25 8.75,9.25 8.75,11
NetC70_1 on Bottom Layer "NETC70_1_L06_P008" (solid, remove dead copper, pour order 8): 4.5,12.25 6,13.75 7,12.75 7,7.75 5.25,7.75 5.25,11.5
NetL4_2 on Bottom Layer "NETL4_2_L06_P007" (solid, remove dead copper, pour order 7): 6.25,2 6.25,-1 9,-1 9.875,-0.125 8.875,0.875 8.625,0.625 7.25,2
NetC66_1 on Bottom Layer "NETC66_1_L06_P006" (solid, remove dead copper, pour order 6): 5,3.75 1.25,3.75 1.25,0.75 3.25,0.75 3.25,-1 5,-1
M2_3V3 on Bottom Layer "M2_3V3_L06_P004" (solid, remove dead copper, pour order 4): 34.25,59.5 35.75,59.5 35.75,58.25 34.25,58.25 34.25,56 22.75,56 22.75,57.75 32.25,57.75 32.25,70.25 22.75,70.25 22.75,72.25 32.25,72.25 32.25,73.5 24.5,73.5 24.5,73.75 22.75,73.75 22.75,74.75 30.5,74.75 30.5,77.25 34.25,77.25

## Silkscreen, mask and mechanical layers (free items; w line width, h text height)
Top Overlay:
  text "DIG_1" at 23.11,86.392 h1
  text "HDMI_1" at 45.11,86.392 h1
  text "HDMI_0" at 68.777,86.392 h1
  text "DIG_0" at 94.776,86.392 h1
Bottom Overlay:
  text "C" at 26.996,67.238 h1.52
  text "D" at 31.52,67.238 h1.52
  text "A" at 26.996,64.988 h1.52
Mechanical 1:
  the board outline again, w0.15

## Text inside footprints (layer, text, board x,y; h text height)
C1: Top Overlay "+" at 447.515,173.986 h1.2 r90
C2: Top Overlay "+" at 431.515,173.986 h1.2 r90
C3: Top Overlay "+" at 402.515,173.986 h1.2 r90
C4: Top Overlay "+" at 373.515,173.986 h1.2 r90
C5: Top Overlay "+" at 344.515,173.986 h1.2 r90
C8: Top Overlay "+" at 311.515,173.986 h1.2 r90
C10: Top Overlay "+" at 299.515,173.986 h1.2 r90
J4: Mechanical 13 "PCB EDGE" at 74.5,87.725 h0.8 r180
J6: Mechanical 13 "PCB EDGE" at 50.5,87.725 h0.8 r180
U24: Top Overlay "*" at 337.886,163.679 h1.27; Mechanical 13 "*" at 339.01,162.801 h1.27
U27: Top Overlay "*" at 666.597,190.746 h1.27; Mechanical 13 "*" at 668.959,190.365 h1.27